# Altium PCB PCB1.PcbDoc
Units mm, origin at the board's own origin, x right, y up, seen from the top; angles counter-clockwise.
Board outline 75 x 52 mm, 2 copper layers (Top Layer, Bottom Layer); 15 components, 11 nets, 49 pads, 0 vias.
Unrouted connection lines stored in the file: 2.
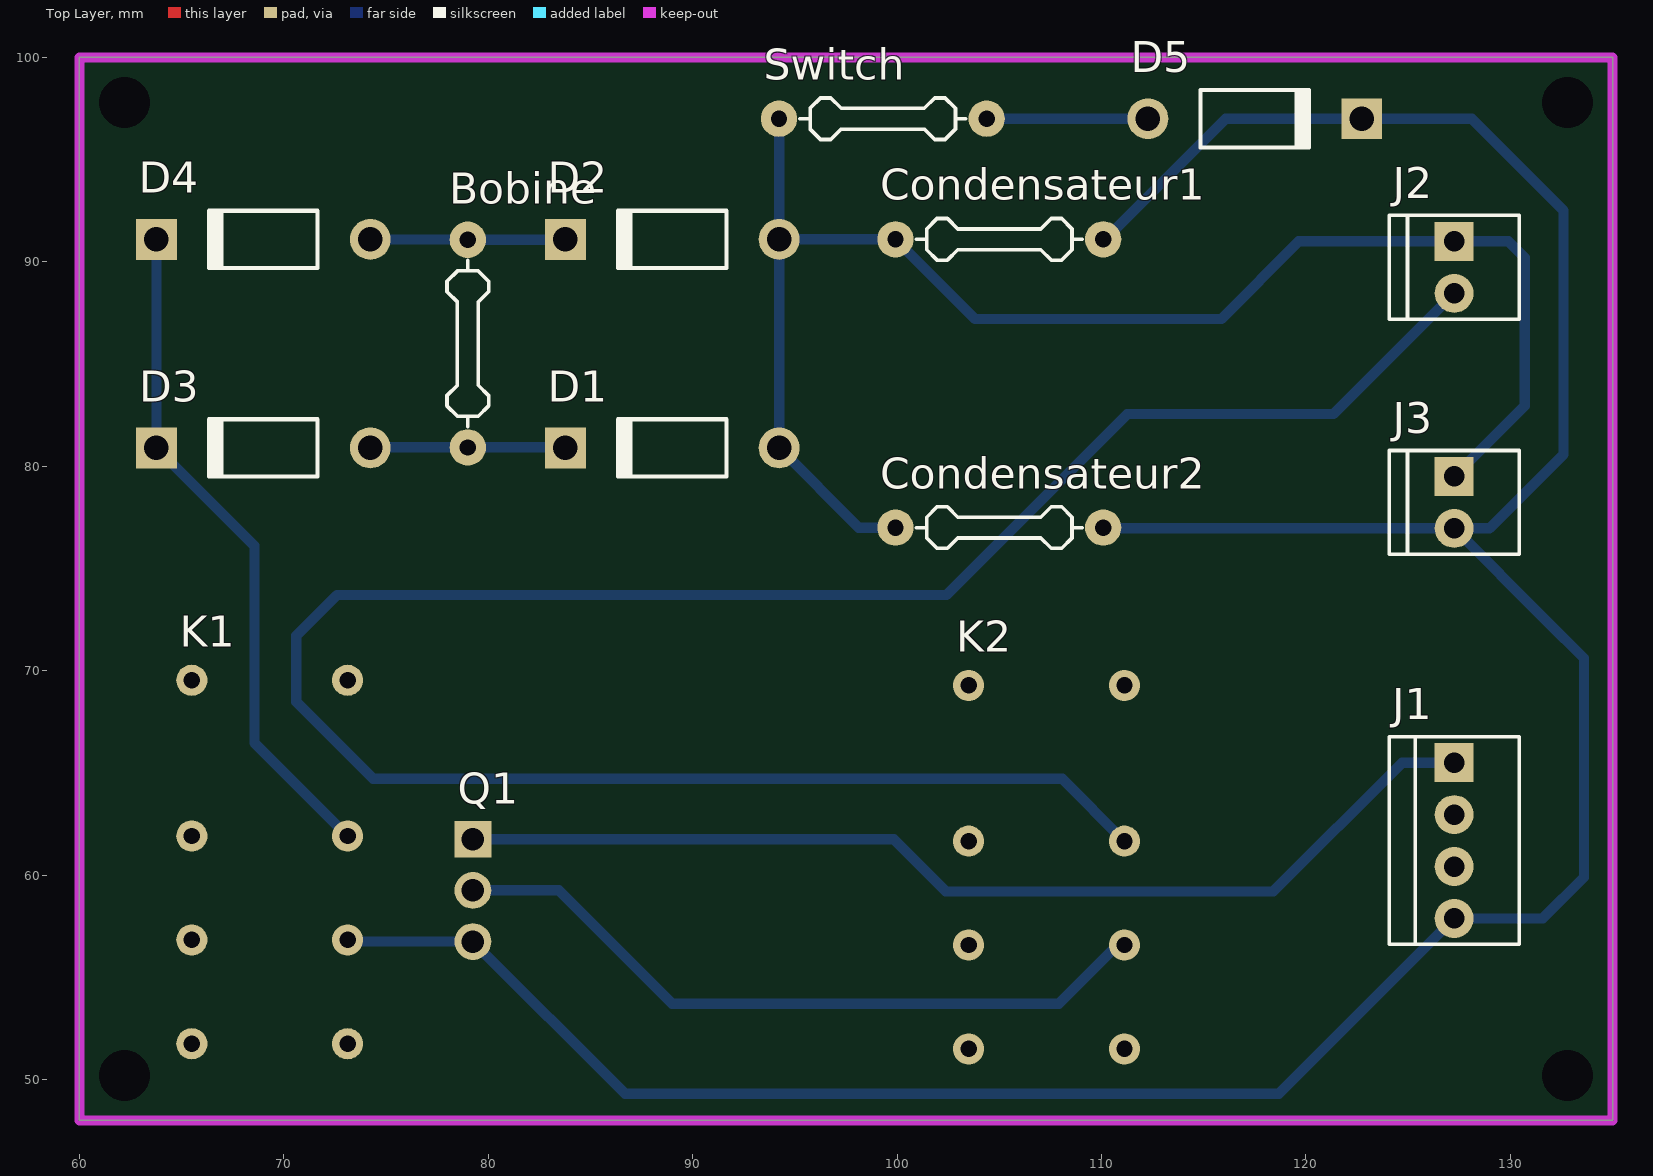
[diagram p0: Top Layer view]
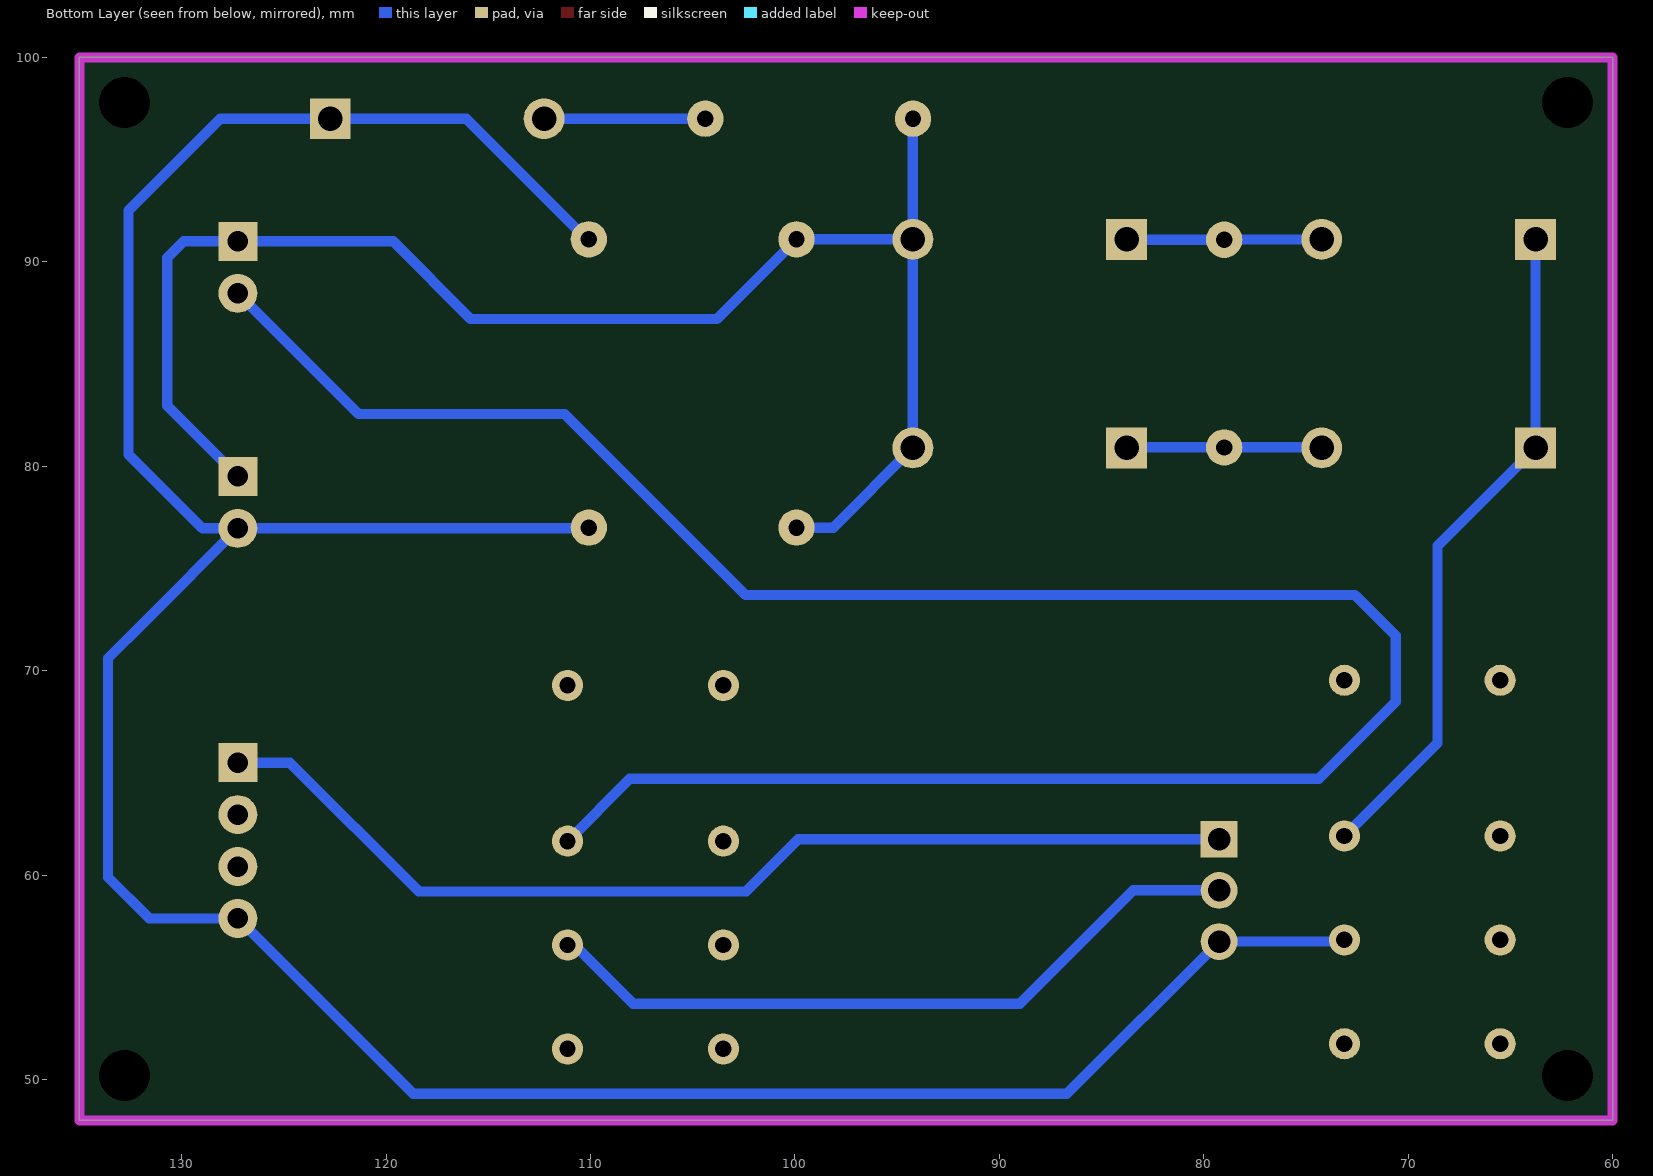
[diagram p1: Bottom Layer view, seen from below]

## Layer stack, top to bottom
Top Solder: solder mask 0.0102, Solder Resist, Dk 3.5
Top Layer: signal copper 0.0356
Dielectric 1: dielectric 0.32, FR-4, Dk 4.8
Bottom Layer: signal copper 0.0356
Bottom Solder: solder mask 0.0102, Solder Resist, Dk 3.5

## Board outline
60,48 135,48 135,100 60,100

## Design rules (kind name [scope] priority, off if disabled: settings)
Clearance [All] p1: gap=0.762
PolygonConnect [All] p1: connectstyle=Relief reliefconductorwidth=0.254 reliefentries=4 polygonreliefangle="90 Angle" airgapwidth=0.254
RoomDefinition BorneChargement [InComponentClass('BorneChargement')] p1 off: confinementstyle=ConfineIn formatcopy=TRUE lockcomponents=FALSE outline 135.697,52.332 265.999,52.332 265.999,74.684 135.697,74.684
RoutingLayers [All] p1: top layer_v5=FALSE bottom layer_v5=TRUE
RoutingVias [All] p1: holewidth=0.711 width=1.27 viastyle="Through Hole" minholewidth=0.711 minwidth=1.27 maxholewidth=0.711 maxwidth=1.27
SolderMaskExpansion [All] p1: expansion=0.102
Width [All] p1: maxlimit=0.508 minlimit=0.508 preferedwidth=0.508
29 further rules are at their usual default settings.

## Components (designator, comment, footprint, x,y, rotation, side; value= is the part's Value field where it differs from the comment)
Bobine "Res 1/4W" "Axial 0.4\" Step" 79,86 r270 top
Condensateur1 "Res 1/4W" "Axial 0.4\" Step" 105,91.1 r0 top
Condensateur2 "Res 1/4W" "Axial 0.4\" Step" 105,77 r0 top
D1 "Diode 1N4004" DO-41 89,80.9 r180 top
D2 "Diode 1N4004" DO-41 89,91.1 r180 top
D3 "Diode 1N4004" DO-41 69,80.9 r180 top
D4 "Diode 1N4004" DO-41 69,91.1 r180 top
D5 "Diode 1N4004" DO-41 117.5,97 r0 top
J1 "MTA100-4" "MTA100-4 MF" 127.25,65.5 r180 top
J2 "Input" MTA100-2 127.25,91 r180 top
J3 "Input" MTA100-2 127.25,79.5 r180 top
K1 "Component_1" PCBComponent_1#1 65.5,51.75 r0 top
K2 "Component_1" PCBComponent_1#1 103.5,51.5 r0 top
Q1 "Component_1" PCBComponent_1#2 79.25,59.25 r180 top
Switch "Res 1/4W" "Axial 0.4\" Step" 99.3,97 r0 top

## Footprints (in the part's own frame and the unit in brackets; to place one, negate y for a bottom-side part, rotate by r counter-clockwise, add the part's x,y. Pads: shape width x height; smd on the part's side, far side on the other; paste and mask are expansions set on the pad)
"Axial 0.4\" Step" [mil] "Axial 3D Step"
  round 70 hole 31.5: 1(-200,0) 2(200,0)
  silkscreen extent -160,-40 160,40, body extent -212,-45 212,46, height 116
DO-41 [mm] "Diode, Axial; Body 5.2 x 2.7 mm (LxDia. max), Lead Dia. 0.86 mm (max)"
  round 2 hole 1.2: 1(-5.23,0)
  rect 2x2 hole 1.2: 2(5.23,0)
  silkscreen extent -2.65,-1.4 2.75,1.4
MTA100-2 [mil] "MTA100-2 M"
  rect 75x75 hole 39.4: 1(0,0)
  round 75 hole 39.4: 2(0,100)
  silkscreen extent -125,-50 125,150, body extent -125,-50 125,150, height 100
"MTA100-4 MF" [mm] "MTA100-4 MF"
  rect 1.905x1.905 hole 1.001: 1(0,0)
  round 1.905 hole 1.001: 2(0,2.54) 3(0,5.08) 4(0,7.62)
  silkscreen extent -3.17,-1.27 3.18,8.89, body extent -3.18,-1.27 3.17,8.89, height 15.93
PCBComponent_1#1 [mil]
  round 60 hole 31.5: 1(300,700) 4(300,400) 6(300,200) 8(300,0) 9(0,0) 11(0,200) 13(0,400) 16(0,700)
PCBComponent_1#2 [mil]
  round 70.87 hole 43.31: D(0,0) S(0,98.43)
  rect 70.87x70.87 hole 43.31: G(0,-98.42)

## Part data
Bobine Condensateur1 Condensateur2 Switch: "Resistor"
D1 D2 D3 D4 D5: "Diode"
J1: "MTA100-4M"
J2 J3: library part MTA100-2, "MTA Male 0 Degres"

## Free pads (board coordinates)
  round 1 hole 2.5: 9(62.2,97.8) 10(62.2,50.2) 11(132.8,50.2) 12(132.8,97.8)

## Nets (pads, with @x,y where several pads share a name; then routed paths per layer and width w, separated by ;. In a path a pad name is that pad's centre, name@x,y a point inside that pad or via, vN(x,y) a via of type N, cw(c..) or ccw(c..) an arc to the next point about the centre after c; other vN are vias at no path point)
CHARGE: J1.2 K1.1
CONDOV+: Condensateur1.1 Condensateur2.1 D1.1 D2.1 J2.1 J3.1 Switch.1 | length 75.5
  Bottom Layer w0.508: Switch.1@94.23,97 D2.1 ; Condensateur2.1 98.13,77 D1.1 D2.1 ; J3.1 130.7,82.95 130.7,90.2 129.9,91 J2.1 119.651,91 115.851,87.2 103.82,87.2 101.942,89.078 Condensateur1.1 D2.1
DECHARGE: J1.3 K2.1
GND: Condensateur1.2 Condensateur2.2 D5.2 J1.4 J3.2 K1.6 K1.16 K2.16 Q1.S | length 150.4
  Bottom Layer w0.508: K1.6@73.12,56.75 Q1.S 86.699,49.301 118.671,49.301 J1.4 131.58,57.88 133.6,59.9 133.6,70.61 131.758,72.452 J3.2 ; Condensateur2.2@110.08,76.96 J3.2 ; Condensateur1.2@110.13,91.05 116.08,97 D5.2 128.1,97 132.6,92.5 132.6,80.581 128.979,76.96 J3.2
MOSFET: J1.1 Q1.G | length 51.7
  Bottom Layer w0.508: Q1.G 99.834,61.75 102.384,59.2 118.4,59.2 124.7,65.5 J1.1
NetBobine_1: Bobine.1 D2.2 D4.1 | length 9.5
  Bottom Layer w0.508: D4.1 Bobine.1 D2.2@83.77,91.08
NetBobine_2: Bobine.2 D1.2 D3.1 | length 9.5
  Bottom Layer w0.508: D3.1@74.23,80.92 Bobine.2 D1.2@83.77,80.92
NetD3_2: D3.2 D4.2 K1.4 | length 33.1
  Bottom Layer w0.508: D4.2 D3.2 68.565,76.105 68.565,66.465 K1.4
NetD5_1: D5.1 Switch.2 | length 7.9
  Bottom Layer w0.508: Switch.2 D5.1
NetJ2_2: J2.2 K2.4 | length 110.2
  Bottom Layer w0.508: K2.4 108.072,64.708 74.376,64.708 70.6,68.484 70.6,71.7 72.6,73.7 89.3,73.7 102.402,73.7 111.257,82.555 121.345,82.555 J2.2
NetK2_6: K2.6 Q1.D | length 35.4
  Bottom Layer w0.508: Q1.D 83.45,59.25 89,53.7 107.9,53.7 110.78,56.58 K2.6
pads on no net: K1.8 K1.9 K1.11 K1.13 K2.8 K2.9 K2.11 K2.13

## Polygon pours and split planes (outlines as drawn)
GND on Top Layer "Top Layer-No Net" (solid, shelved, pour order 2): 60,100 60,48 135,48 135,100
GND on Bottom Layer "Top Layer-No Net" (solid, shelved, pour order 4): 60,100 60,48 135,48 135,100

## Keep-outs
Keep-Out Layer:
  the board outline again, w0.5

## Silkscreen, mask and mechanical layers (free items; w line width, h text height)
Mechanical 1:
  text "Charge/decharge" at 67.2,97.1 h1.52
  text "Electroaimant" at 67.4,94.6 h1.52
  text "Switch" at 95.2,94.1 h1.52
  text "Aimant" at 132.1,93.6 h1.52 r270
  text "Bobine" at 75,85.1 h1.52
  text "Tension" at 123.1,73.8 h1.52
  text "Condo" at 123.5,71.7 h1.52
  text "Controle" at 132,67.3 h1.52 r270